# Altium PCB main_20171009.PcbDoc
Units mil, origin at the board's own origin, x right, y up, seen from the top; angles counter-clockwise.
Board outline 6000 x 4000 mil, 2 copper layers (Top Layer, Bottom Layer); 27 components, 34 nets, 176 pads, 0 vias.
Unrouted connection lines stored in the file: 2.
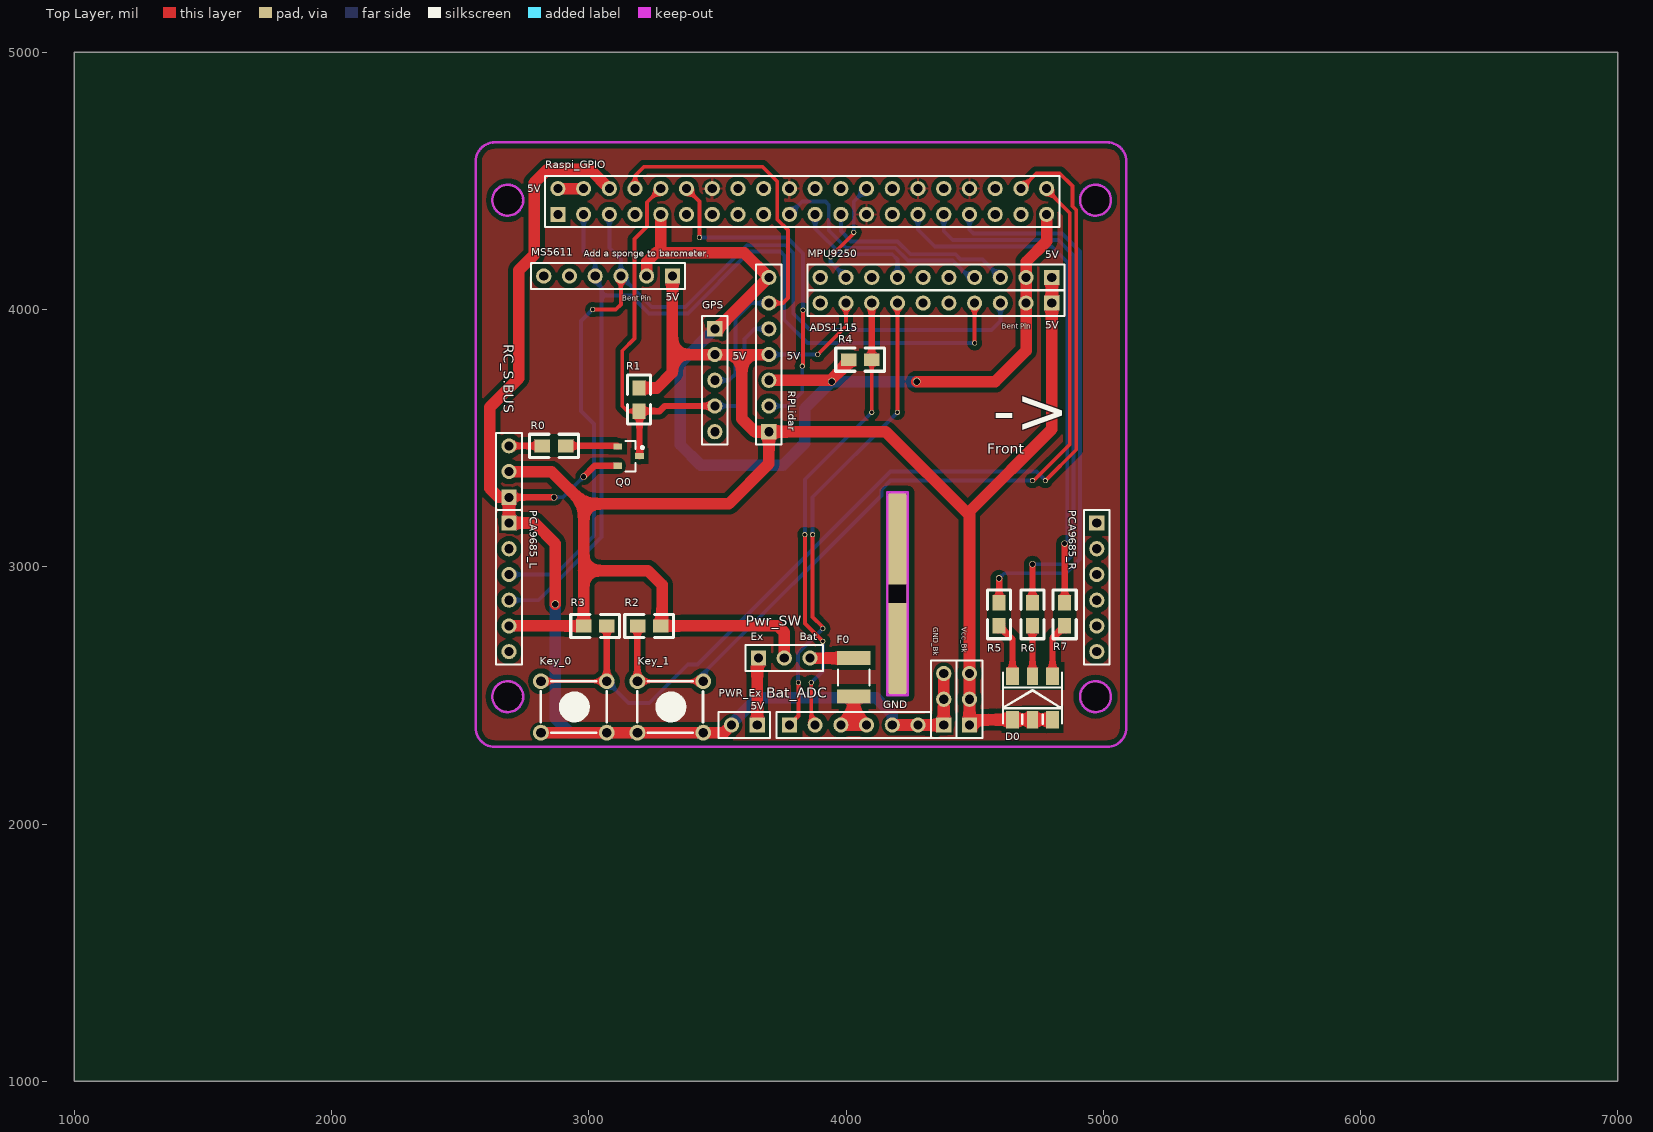
[diagram p0: Top Layer view]
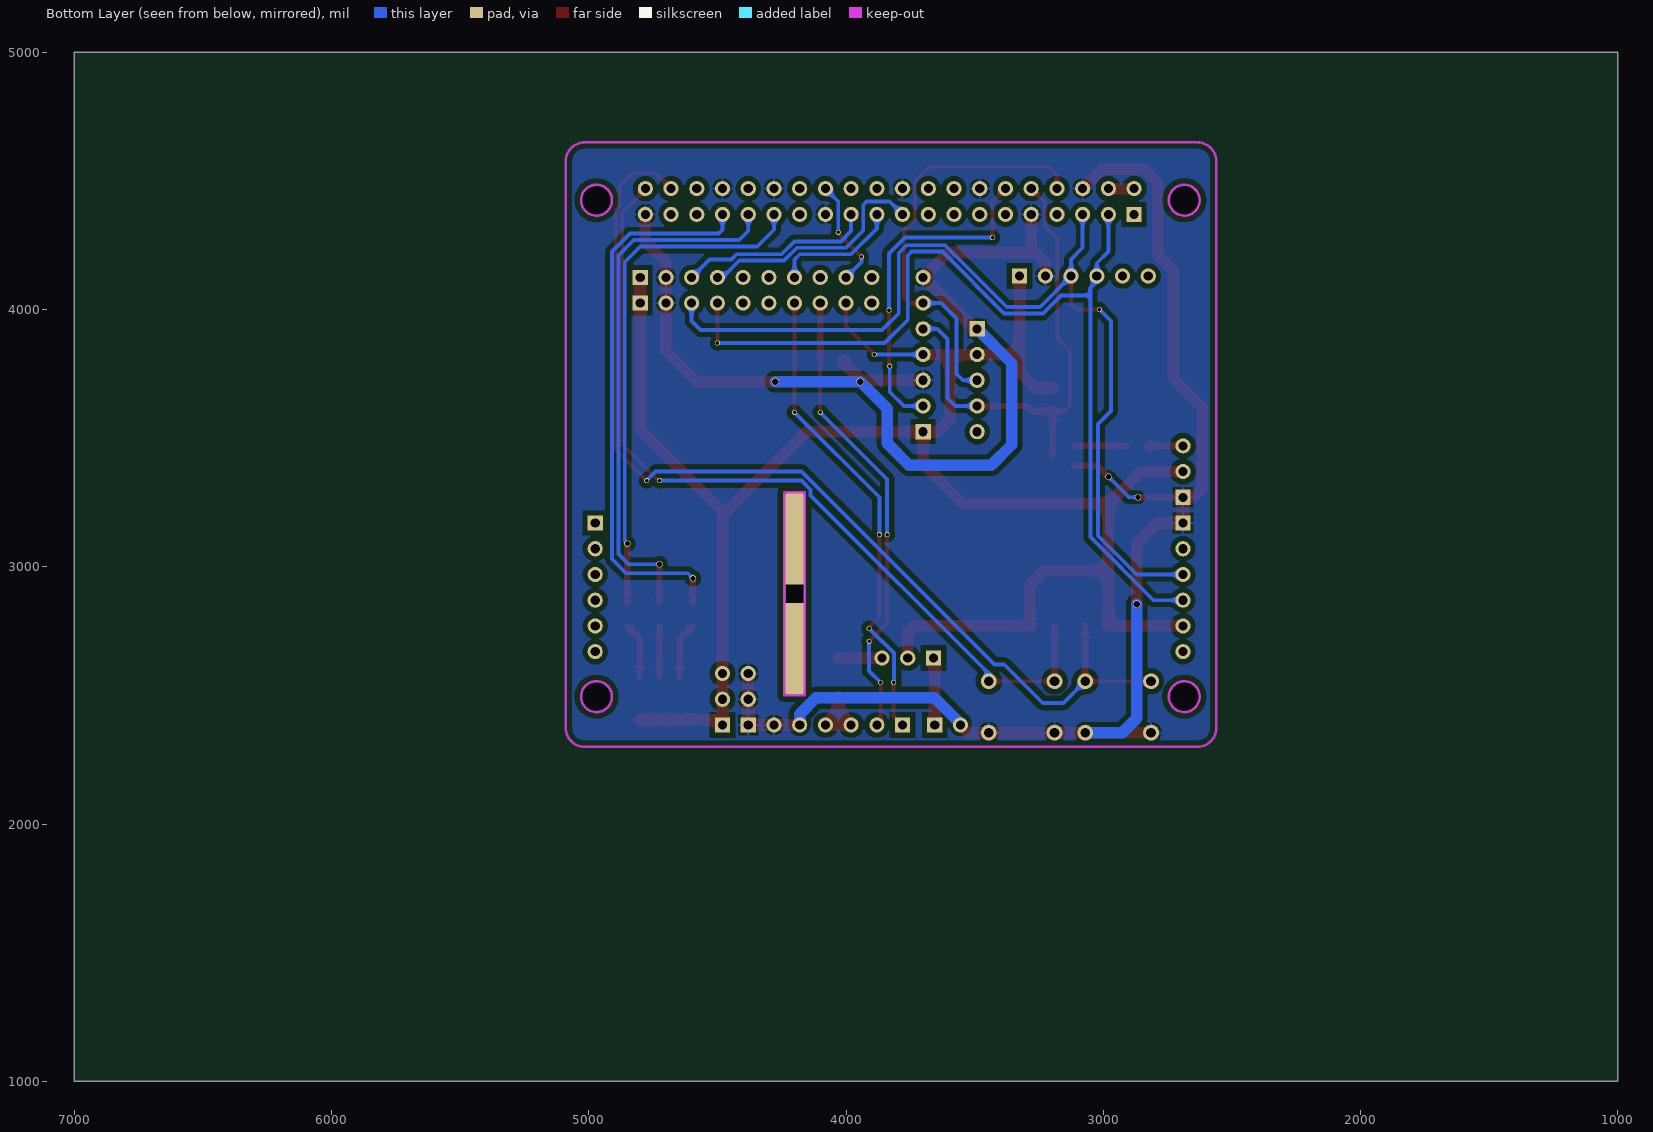
[diagram p1: Bottom Layer view, seen from below]

## Layer stack, top to bottom
Top Solder: solder mask 0.4, Solder Resist, Dk 3.5
Top Layer: signal copper 1.4
Dielectric 1: dielectric 12.6, FR-4, Dk 4.8
Bottom Layer: signal copper 1.4
Bottom Solder: solder mask 0.4, Solder Resist, Dk 3.5

## Board outline
1000,1000 7000,1000 7000,5000 1000,5000

## Design rules (kind name [scope] priority, off if disabled: settings)
Clearance [All] p1: gap=10
PolygonConnect [All] p1: connectstyle=Relief reliefconductorwidth=10 reliefentries=4 polygonreliefangle="90 Angle" airgapwidth=10
RoomDefinition Sensors [InComponentClass('Sensors')] p1: confinementstyle=ConfineIn formatcopy=TRUE lockcomponents=FALSE outline 0,0 2000,0 2000,1000 0,1000
RoomDefinition Rpi_GPIO [InComponentClass('Rpi_GPIO')] p2: confinementstyle=ConfineIn formatcopy=TRUE lockcomponents=FALSE outline 0,0 2000,0 2000,1000 0,1000
RoomDefinition etc [InComponentClass('etc')] p3: confinementstyle=ConfineIn formatcopy=TRUE lockcomponents=FALSE outline 0,0 2000,0 2000,1000 0,1000
RoutingVias [All] p1: holewidth=28 width=50 viastyle="Through Hole" minholewidth=28 minwidth=50 maxholewidth=28 maxwidth=50
SolderMaskExpansion [All] p1: expansion=4
Width [All] p1: maxlimit=50 minlimit=15 preferedwidth=15
30 further rules are at their usual default settings.

## Classes and differential pairs
component class Rpi_GPIO: Raspi_GPIO
component class Sensors: ADS1115 D0 GPS Key_0 Key_1 MPU9250 MS5611 PCA9685_L PCA9685_R Q0 R0 R1 R2 R3 R4 R5 R6 R7 RC_S.BUS RPLidar
component class etc: Bat_ADC F0 GND_Bk PWR_Ex Pwr_SW Vcc_Bk

## Components (designator, comment, footprint, x,y, rotation, side; value= is the part's Value field where it differs from the comment)
ADS1115 "第一轮先用于测试" HDR1X10 4800,4025 r180 top
Bat_ADC "最好是GH接头的，但是考虑到焊接难度，还是修改电压计的线" HDR1X6 3780,2385 r0 top
D0 "LED-RGB" LED_5050_RGB 4735,2510 r90 top
F0 "3A，如果电供不上就直接短接" 1812 4030,2570 r270 top
GND_Bk "备用引脚" HDR1X3 4380,2385 r90 top
GPS "弯排母" HDR1X5 3490,3925 r270 top
Key_0 "" KEY_M 2814.09,2555 r0 top
Key_1 "" KEY_M 3189.09,2555 r0 top
MPU9250 "Header 10" HDR1X10 4800,4125 r180 top
MS5611 "记得粘海绵~" HDR1X6 3325,4130 r180 top
PCA9685_L "Header 6" HDR1X6 2690,3170 r270 top
PCA9685_R "Header 6" HDR1X6 4975,3170 r270 top
PWR_Ex "额外电源供电，最好使用接线端子" HDR1X2 3655,2385 r180 top
Pwr_SW "通过跳线帽选择从飞机电池供电还是额外供电" HDR1X3 3660,2645 r0 top
Q0 "9013" SOT23_L 3155,3430 r0 top
R0 "Res2" 0805 2910,3470 r180 top
R1 "Res2" 0805 3195,3605 r90 top
R2 "Res2" 0805 3190,2770.06 r0 top
R3 "Res2" 0805 3070,2769.94 r180 top
R4 "Res2" 0805 4010,3805.06 r0 top
R5 "Res2" 0805 4595.06,2860 r270 top
R6 "Res2" 0805 4725.06,2860 r270 top
R7 "Res2" 0805 4850.06,2860 r270 top
Raspi_GPIO "Header 20X2" HDR2X20 2880,4370 r0 top
RC_S.BUS "Header 3" HDR1X3 2690,3270 r90 top
RPLidar "Header 7" HDR1X7 3700,3525 r90 top
Vcc_Bk "备用引脚" HDR1X3 4480,2385 r90 top

## Footprints (in the part's own frame and the unit in brackets; to place one, negate y for a bottom-side part, rotate by r counter-clockwise, add the part's x,y. Pads: shape width x height; smd on the part's side, far side on the other; paste and mask are expansions set on the pad)
0805 [mil]
  rect 60x50 smd: 1(0,-0.06) 2(90,-0.06)
  silkscreen extent -50,-45 140,45
1812 [mm] "Chip Capacitor, Body 4.5x3.2mm, IPC High Density"
  rect 1.4x3.3 smd: 1(-1.9,0) 2(1.9,0)
  silkscreen extent -0.8,-1.55 0.8,1.55, body extent -2.4,-1.7 2.4,1.7, height 1.4
HDR1X2 [mm] "Connector; Header; 2 Position"
  rect 1.5x1.5 hole 0.9: 1(0,0)
  round 1.5 hole 0.9: 2(2.54,0)
  silkscreen extent -1.27,-1.27 3.81,1.27
HDR1X3 [mm] "Connector; Header; 3 Position"
  rect 1.5x1.5 hole 0.9: 1(0,0)
  round 1.5 hole 0.9: 2(2.54,0) 3(5.08,0)
  silkscreen extent -1.27,-1.27 6.35,1.27
HDR1X5 [mm] "Connector; Header; 5 Position"
  rect 1.5x1.5 hole 0.9: 1(0,0)
  round 1.5 hole 0.9: 2(2.54,0) 3(5.08,0) 4(7.62,0) 5(10.16,0)
  silkscreen extent -1.27,-1.27 11.43,1.27
HDR1X6 [mm] "Connector; Header; 6 Position"
  rect 1.5x1.5 hole 0.9: 1(0,0)
  round 1.5 hole 0.9: 2(2.54,0) 3(5.08,0) 4(7.62,0) 5(10.16,0) 6(12.7,0)
  silkscreen extent -1.27,-1.27 13.97,1.27
HDR1X7 [mm] "Connector; Header; 7 Position"
  rect 1.5x1.5 hole 0.9: 1(0,0)
  round 1.5 hole 0.9: 2(2.54,0) 3(5.08,0) 4(7.62,0) 5(10.16,0) 6(12.7,0) 7(15.24,0)
  silkscreen extent -1.27,-1.27 16.51,1.27
HDR1X10 [mm] "Connector; Header; 10 Position"
  rect 1.5x1.5 hole 0.9: 1(0,0)
  round 1.5 hole 0.9: 2(2.54,0) 3(5.08,0) 4(7.62,0) 5(10.16,0) 6(12.7,0) 7(15.24,0) 8(17.78,0) 9(20.32,0) 10(22.86,0)
  silkscreen extent -1.27,-1.27 24.13,1.27
HDR2X20 [mm] "Connector; Header; 20x2 Position"
  rect 1.5x1.5 hole 0.9: 1(0,0)
  round 1.5 hole 0.9: 2(0,2.54) 3(2.54,0) 4(2.54,2.54) 5(5.08,0) 6(5.08,2.54) 7(7.62,0) 8(7.62,2.54) 9(10.16,0) 10(10.16,2.54) 11(12.7,0) 12(12.7,2.54) 13(15.24,0) 14(15.24,2.54) 15(17.78,0) 16(17.78,2.54) 17(20.32,0) 18(20.32,2.54) 19(22.86,0) 20(22.86,2.54) 21(25.4,0) 22(25.4,2.54) 23(27.94,0) 24(27.94,2.54) 25(30.48,0) 26(30.48,2.54) 27(33.02,0) 28(33.02,2.54) 29(35.56,0) 30(35.56,2.54) 31(38.1,0) 32(38.1,2.54) 33(40.64,0) 34(40.64,2.54) 35(43.18,0) 36(43.18,2.54) 37(45.72,0) 38(45.72,2.54) 39(48.26,0) 40(48.26,2.54)
  silkscreen extent -1.27,-1.27 49.53,3.81
KEY_M [mil]
  round 62 hole 38: 1(0,0) 1(255.91,0) 2(0,-200) 2(255.91,-200)
  silkscreen extent 0,-200 255,0
LED_5050_RGB [mm]
  rect 1.7x1.25 smd: A(-2.658,-1.721) A(-2.658,2.229)
  rect 1.7x1.1 smd: A(-2.658,0.254) K2(1.642,0.254)
  rect 1.7x1.3 smd: K1(1.642,2.229) K3(1.642,-1.721)
  silkscreen extent -3.05,-2.67 1.99,3.17
SOT23_L [mm] "SOT23, 3-Leads, Body 2.9x1.3mm, Pitch 0.95mm, Lead Span 2.3mm - Reverse Pinning, IPC High Density"
  rect 0.85x0.6 smd: 1(1.075,0) 2(-1.075,-0.95) 3(-1.075,0.95)
  silkscreen extent -0.3,-1.5 1.48,1.5, body extent -0.7,-1.5 0.7,1.5, height 1.1

## Part data
ADS1115: library part "Header 10", "Header, 10-Pin"
Bat_ADC MS5611: library part "Header 6", "Header, 6-Pin"
D0: "三基色LED"
F0: library part "Fuse 2", "Fuse"
GND_Bk Pwr_SW Vcc_Bk: library part "Header 3", "Header, 3-Pin"
GPS: library part "Header 5", "Header, 5-Pin"
Key_0 Key_1: library part KEY_M
MPU9250: "Header, 10-Pin"
PCA9685_L PCA9685_R: "Header, 6-Pin"
PWR_Ex: library part "Header 2", "Header, 2-Pin"
Q0: library part 2N3904, "NPN General Purpose Amplifier"
R0 R1 R2 R3 R4 R5 R6 R7: "Resistor"
Raspi_GPIO: "Header, 20-Pin, Dual row"
RC_S.BUS: "Header, 3-Pin"
RPLidar: "Header, 7-Pin"

## Free pads (board coordinates)
  round 25 hole 20: 2(2865,3270) 2(2980,3350) 2(4595,2955) 2(4725,3010) 2(4850,3090)
  round 20 hole 14: 2(3015,4000) 2(3430,4280) 2(3815,2550) 2(3830,3780) 2(3832.68,3997.68) 2(3840,3125) 2(3865,2550) 2(3870,3125) 2(3890,3825) 2(3910,2710) 2(3910,2760) 2(3940,4205) 2(4030,4300) 2(4100,3600) 2(4200,3600) 2(4500,3870) 2(4725,3335) 2(4775,3335)
  round 30 hole 25: 3(2870,2855) 3(3945,3720) 3(4275,3720)
  round 120 hole 115 unplated: 7(2685,2495) 7(2685,4425) 7(4970,2495) 7(4970,4425)
  rrect50% 80x790 hole 70 square unplated: 8(4200,2895)

## Nets (pads, with @x,y where several pads share a name; then routed paths per layer and width w, separated by ;. In a path a pad name is that pad's centre, name@x,y a point inside that pad or via, vN(x,y) a via of type N, cw(c..) or ccw(c..) an arc to the next point about the centre after c; other vN are vias at no path point)
3V3: Raspi_GPIO.1 Raspi_GPIO.17
5V: Raspi_GPIO.2 Raspi_GPIO.4 | length 100
  Top Layer w45: Raspi_GPIO.2 Raspi_GPIO.4
BACKUP_1: Raspi_GPIO.11
BACKUP_2: Raspi_GPIO.13
CUR_5: ADS1115.8 Bat_ADC.2 pad.2@3840,3125 pad.2@3865,2550 pad.2@3910,2710 pad.2@4100,3600 R4.2 | length 1801.5
  Top Layer w15: pad.2@3840,3125 3840,2780 pad.2@3910,2710 ; pad.2@3865,2550 3865,2400 Bat_ADC.2 ; pad.2@4100,3600 R4.2
  Top Layer w25: R4.2 ADS1115.8
  Bottom Layer w15: pad.2@3840,3125 3840,3340 pad.2@4100,3600 ; pad.2@3865,2550 3910,2595 pad.2@3910,2710
GND: ADS1115.2 Bat_ADC.5 Bat_ADC.6 GND_Bk.1 GND_Bk.2 GND_Bk.3 GPS.1 Key_0.2 Key_1.2 MPU9250.2 MS5611.2 pad.2@2865,3270 pad.2@2980,3350 pad.3 PCA9685_L.1 PWR_Ex.2 Q0.2 R4.1 Raspi_GPIO.6 Raspi_GPIO.9 Raspi_GPIO.14 Raspi_GPIO.20 Raspi_GPIO.25 Raspi_GPIO.30 Raspi_GPIO.34 Raspi_GPIO.39 RC_S.BUS.1 RPLidar.3 RPLidar.7 | length 9363.8
  Top Layer w15: GPS.1 GPS.1@3500,3925
  Top Layer w25: RC_S.BUS.1 pad.2@2865,3270 ; pad.2@2980,3350 3022.6,3392.6 Q0.2
  Top Layer w45: Key_0.2@2814.09,2355 3070,2355 3189.09,2355 3445,2355 3525,2355 PWR_Ex.2 ; pad.3@2870,2855 2870,3090 2790,3170 PCA9685_L.1 RC_S.BUS.1 2650,3270 2615,3305 2615,3620 2727.5,3732.5 2727.5,4152.5 2787.5,4212.5 2787.5,4492.5 2840,4545 3005,4545 Raspi_GPIO.6 ; MS5611.2 3225,4185 3260,4220 3285,4220 ; Raspi_GPIO.9 3280,4225 3285,4220 ; GPS.1@3500,3925 RPLidar.7 3605,4220 3285,4220 ; RPLidar.3 3940,3725 4010,3795 R4.1 ; Bat_ADC.5 Bat_ADC.6 GND_Bk.1 GND_Bk.2 GND_Bk.3 ; pad.3@4275,3720 4580,3720 4700,3840 ADS1115.2 MPU9250.2 4700,4185 4780,4265 Raspi_GPIO.39
  Bottom Layer w15: pad.2@2865,3270 2900,3270 pad.2@2980,3350
  Bottom Layer w45: pad.3@2870,2855 2870,2410.91 2925.91,2355 Key_0.2@3070,2355 ; GPS.1 3355,3790 3355,3475 3435,3395 3755,3395 3840,3480 3840,3615 3945,3720 pad.3@4275,3720 ; PWR_Ex.2 3555,2390.02 3654.98,2490 4116.97,2490 4180,2426.97 Bat_ADC.5
I2C_SCL: ADS1115.3 MS5611.3 pad.2@3015,4000 PCA9685_L.3 Raspi_GPIO.5 | length 3781.2
  Top Layer w15: pad.2@3015,4000 3105,4000 3125,4020 MS5611.3
  Bottom Layer w15: PCA9685_L.3 2869.64,2970 3020,3120.36 3020,3555 2970,3605 2970,3955 pad.2@3015,4000 ; Raspi_GPIO.5 3080,4240 3125,4195 MS5611.3 3245,4010 3375,4010 3615,4250 3765,4250 3795,4220 3795,3985 3860,3920 4565,3920 4600,3955 ADS1115.3
I2C_SDA: ADS1115.4 MS5611.4 pad.2@4500,3870 PCA9685_L.4 Raspi_GPIO.3 | length 3772.4
  Top Layer w15: pad.2@4500,3870 ADS1115.4
  Bottom Layer w15: PCA9685_L.4 2805,2870 3050,3115 3050,4055 ; Raspi_GPIO.3 2980,4225 3025,4180 MS5611.4 3025,4110 3050,4085 3050,4055 ; pad.2@4500,3870 3850,3870 3760,3960 3760,4210 3745,4225 3625.36,4225 3385.36,3985 3234.64,3985 3164.64,4055 3050,4055
KEY_0: Key_0.1 pad.2@4775,3335 R3.1 Raspi_GPIO.38 | length 4044.9
  Top Layer w15: Key_0.1@2814.09,2555 Key_0.1@3070,2555 ; Raspi_GPIO.38 4740,4530 4830,4530 4880,4480 4880,4401.33 4895,4386.33 4895,3455 pad.2@4775,3335
  Top Layer w25: Key_0.1@3070,2555 R3.1
  Bottom Layer w15: Key_0.1@3070,2555 3155,2470 3235,2470 3385,2620 3422.82,2620 4172.82,3370 4740,3370 pad.2@4775,3335
KEY_1: Key_1.1 pad.2@4725,3335 R2.1 Raspi_GPIO.40 | length 3335
  Top Layer w15: Key_1.1@3189.09,2555 Key_1.1@3445,2555 ; R2.1@3189.09,2769.09 R2.1 ; pad.2@4730,3335 4870,3475 4870,4375.98 4780,4465.98 Raspi_GPIO.40
  Top Layer w25: Key_1.1@3189.09,2555 R2.1@3189.09,2769.09
  Bottom Layer w15: Key_1.1@3445,2555 3445,2585 4137.5,3277.5 4137.5,3299.32 4173.18,3335 pad.2@4725,3335
LED_B: pad.2@4595,2955 R5.1 Raspi_GPIO.33 | length 2161.3
  Top Layer w25: R5.1 pad.2@4595,2955
  Bottom Layer w15: Raspi_GPIO.33 4480,4310 4495,4295 4840,4295 4910,4225 4910,3030 4855,2975 4615,2975 pad.2@4595,2955
LED_G: pad.2@4725,3010 R6.1 Raspi_GPIO.31 | length 2095.9
  Top Layer w25: R6.1 pad.2@4725,3010
  Bottom Layer w15: Raspi_GPIO.31 4380,4305 4415,4270 4825,4270 4885,4210 4885,3050 4845,3010 pad.2@4725,3010
LED_R: pad.2@4850,3090 R7.1 Raspi_GPIO.29 | length 2015.9
  Top Layer w25: R7.1 pad.2@4850,3085
  Bottom Layer w15: Raspi_GPIO.29 4280,4310 4345,4245 4800,4245 4860,4185 4860,3100 pad.2@4850,3090
MOTOCTL: pad.2@3430,4280 pad.2@3830,3780 pad.2@3832.68,3997.68 Raspi_GPIO.12 RPLidar.2 | length 1329.7
  Top Layer w15: Raspi_GPIO.12 3430,4420 pad.2@3430,4280 ; pad.2@3832.68,3780 pad.2@3832.68,3997.68
  Bottom Layer w15: pad.2@3430,4280 3770.36,4280 3832.68,4217.68 pad.2@3832.68,3997.68 ; RPLidar.2 3775,3625 3830,3680 pad.2@3830,3780
MPU9250_CS: MPU9250.9 pad.2@3940,4205 pad.2@4030,4300 Raspi_GPIO.26 | length 427.8
  Top Layer w15: pad.2@3940,4205 4030,4295 pad.2@4030,4300
  Bottom Layer w15: pad.2@3940,4205 3940,4185 MPU9250.9 ; pad.2@4030,4300 4030,4420 Raspi_GPIO.26
MPU9250_INT: Raspi_GPIO.16
NetBat_ADC_3: Bat_ADC.3 Bat_ADC.4 F0.2 | length 301.6
  Top Layer w45: F0.2 4030,2435 ; 4030,2435 Bat_ADC.4 Bat_ADC.3 4030,2435
NetD0_1: D0.K1 R5.2 | length 217
  Top Layer w25: R5.2 4647.24,2717.76 D0.K1
NetD0_3: D0.K2 R6.2 | length 195.4
  Top Layer w25: D0.K2 R6.2
NetD0_4: D0.K3 R7.2 | length 214.9
  Top Layer w25: D0.K3 4802.76,2722.76 R7.2
NetQ0_2: Q0.3 R0.1 | length 203.8
  Top Layer w25: R0.1 3110.01,3470.06 Q0.3
PPM_DECODE: Raspi_GPIO.7
PPS_GPS: GPS.5
SBUS_IN: R0.2 RC_S.BUS.3 | length 130
  Top Layer w25: RC_S.BUS.3 R0.2@2819.94,3470
  Top Layer w45: R0.2@2819.94,3470 R0.2
SCLK_9250: MPU9250.3 Raspi_GPIO.23 | length 759.6
  Bottom Layer w15: Raspi_GPIO.23 3980,4305 4020,4265 4200.71,4265 4250.71,4215 4425.36,4215 4445.36,4195 4530,4195 MPU9250.3
SDI_9250: MPU9250.4 Raspi_GPIO.19 | length 921.5
  Bottom Layer w15: Raspi_GPIO.19 3830,4420 3920,4420 3932.97,4407.03 3932.97,4307.03 4000,4240 4190.36,4240 4240.36,4190 4415,4190 4480,4125 MPU9250.4
SDO_9250: MPU9250.7 Raspi_GPIO.21 | length 494.7
  Bottom Layer w15: Raspi_GPIO.21 3880,4315 3980,4215 4180,4215 4200,4195 MPU9250.7
UBLOX_CS: Raspi_GPIO.24
USART_RX: GPS.4 Q0.1 R1.1 Raspi_GPIO.10 RPLidar.5 | length 1928.6
  Top Layer w15: R1.1 3150,3605 3130,3625 3130,3840 3177.97,3887.97 3177.97,4273.92 3227.03,4322.97 3227.03,4417.03 Raspi_GPIO.10
  Top Layer w25: R1.1 3275,3605 3295,3625 GPS.4 ; Q0.1 R1.1@3197.32,3602.74
  Top Layer w45: R1.1 R1.1@3197.32,3602.74
  Bottom Layer w15: GPS.4 3575,3625 3605,3655 3605,3885 3645,3925 RPLidar.5
USART_TX: GPS.3 Raspi_GPIO.8 RPLidar.6 | length 1654.4
  Top Layer w15: Raspi_GPIO.8 3180,4520 3215,4555 3675,4555 3732.97,4497.03 3732.97,4350.52 3775,4308.49 3775,4045 3755,4025 RPLidar.6
  Bottom Layer w15: GPS.3 3545,3725 3570,3750 3570,3965 3630,4025 RPLidar.6
V_BATEX: PWR_Ex.1 Pwr_SW.1 | length 262.1
  Top Layer w45: PWR_Ex.1 3655,2640 Pwr_SW.1
V_UBEC: F0.1 Pwr_SW.3 | length 170.1
  Top Layer w45: Pwr_SW.3 3860.2,2644.8 F0.1
VCC: ADS1115.1 ADS1115.9 D0.A GPS.2 MPU9250.1 MS5611.1 pad.2@3890,3825 PCA9685_L.5 Pwr_SW.2 R1.2 R2.2 R3.2 RC_S.BUS.2 RPLidar.1 RPLidar.4 Vcc_Bk.1 Vcc_Bk.2 Vcc_Bk.3 | length 7925.6
  Top Layer w15: R2.2 R2.2@3285,2775 ; pad.2@3890,3825 4000,3935 ADS1115.9 ; 4480,3200 4480,3215
  Top Layer w45: PCA9685_L.5 R3.2@2975,2770 ; RC_S.BUS.2 2855,3370 2980,3245 ; R3.2 2980,2985 ; R1.2 3265,3695 3325,3755 3325,3825 ; R2.2 3735,2770 3760,2745 Pwr_SW.2 ; R2.2@3285,2775 3285,2930 3230,2985 2980,2985 ; MS5611.1 3325,3825 ; RPLidar.4 3595,3825 ; 4480,3215 4800,3535 ADS1115.1 MPU9250.1 ; D0.A@4802.76,2405.35 4647.24,2405.35 4500.35,2405.35 Vcc_Bk.1 Vcc_Bk.2 Vcc_Bk.3 4480,3200 4155,3525 RPLidar.1 ; 2980,2985 2980,3245 ; 2980,3245 3545,3245 3700,3400 RPLidar.1 ; 3325,3825 GPS.2 3595,3825 ; 3595,3825 3595,3575 3645,3525 RPLidar.1
  Bottom Layer w15: RPLidar.4 pad.2@3890,3825
VOL_5: ADS1115.7 Bat_ADC.1 pad.2@3815,2550 pad.2@3870,3125 pad.2@3910,2760 pad.2@4200,3600 | length 1845.9
  Top Layer w15: Bat_ADC.1 3815,2420 pad.2@3815,2550 ; pad.2@3870,3125 3870,2805 3910,2765 pad.2@3910,2760 ; pad.2@4200,3600 ADS1115.7
  Bottom Layer w15: pad.2@3812.97,2552.97 3812.97,2664.48 3858.49,2710 3860,2710 pad.2@3910,2760 ; pad.2@3870,3125 3870,3270 pad.2@4200,3600
pads on no net: ADS1115.5 ADS1115.6 ADS1115.10 MPU9250.5 MPU9250.6 MPU9250.8 MPU9250.10 MS5611.5 MS5611.6 PCA9685_L.2 PCA9685_L.6 PCA9685_R.1 PCA9685_R.2 PCA9685_R.3 PCA9685_R.4 PCA9685_R.5 PCA9685_R.6 Raspi_GPIO.15 Raspi_GPIO.18 Raspi_GPIO.22 Raspi_GPIO.27 Raspi_GPIO.28 Raspi_GPIO.32 Raspi_GPIO.35 Raspi_GPIO.36 Raspi_GPIO.37

## Polygon pours and split planes (outlines as drawn)
GND on Top Layer "Mechanical 1-No Net" (solid, pour order 10): 2560,4650 2560,2305 2565,2300 5090,2300 5090,4650
GND on Bottom Layer "Mechanical 1-No Net" (solid, pour order 12): 2560,4650 2560,2300 5090,2300 5090,4650

## Keep-outs
Keep-Out Layer:
  circle w10: c4970,2495 r60
  circle w10: c2685,2495 r60
  circle w10: c4970,4425 r60
  circle w10: c2685,4425 r60
  lines w10: 2635,4650 ccw(c2635,4575) 2560,4575 2560,2375 ccw(c2635,2375) 2635,2300 5015,2300 ccw(c5015,2375) 5090,2375 5090,3680 5090,4575 ccw(c5015,4575) 5015,4650 ; 2635,4650 5015,4650 ; 2635,4650 5015,4650 ; 4160,2500 4160,3290 4240,3290 4240,2500 4160,2500

## Silkscreen, mask and mechanical layers (free items; w line width, h text height)
Top Overlay:
  text "5V" at 2760,4455 h30
  text "Add a sponge to barometer." at 2980,4205 h25
  text "5V" at 4775,4200 h30
  text "Bent Pin" at 3130,4035 h20
  text "5V" at 3300,4035 h30
  text "Bent Pin" at 4605,3925 h20
  text "5V" at 4775,3925 h30
  text "5V" at 3560,3805 h30
  text "5V" at 3770,3805 h30
  text "->" at 4570,3520 h180
  text "Front" at 4550,3440 h40
  text "Ex" at 3630,2715 h30
  text "Bat" at 3820,2715 h30
  text "GND" at 4145,2450 h30
  text "5V" at 3630,2445 h30